# Altium PCB Stanok_driver.PcbDoc
Units mil, origin at the board's own origin, x right, y up, seen from the top; angles counter-clockwise.
Board outline 6000 x 4000 mil, 2 copper layers (Top Layer, Bottom Layer), stack 61.756 mil thick; 63 components, 42 nets, 179 pads, 0 vias.
Unrouted connection lines stored in the file: 114.
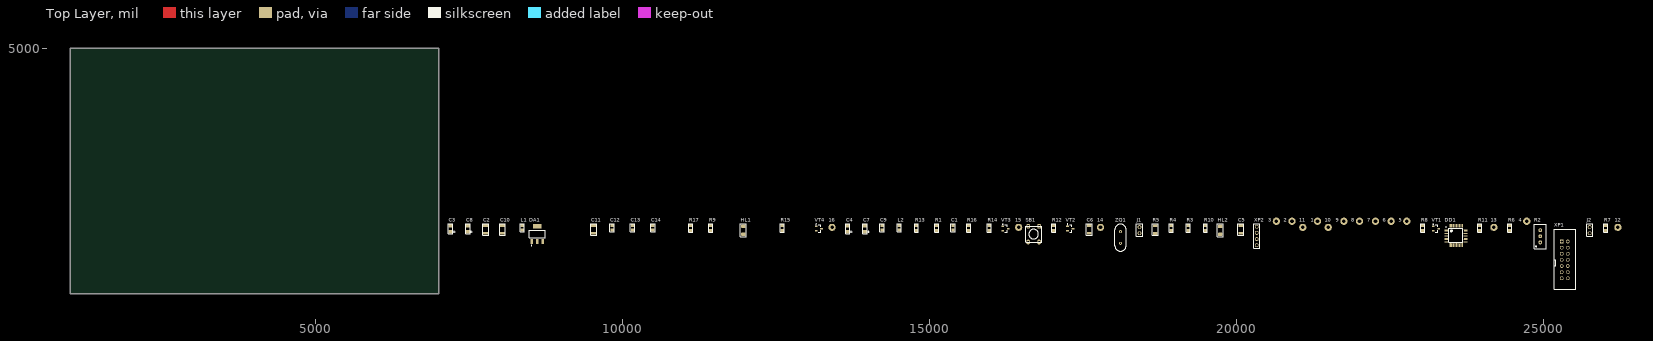
[diagram p0: Top Layer view]
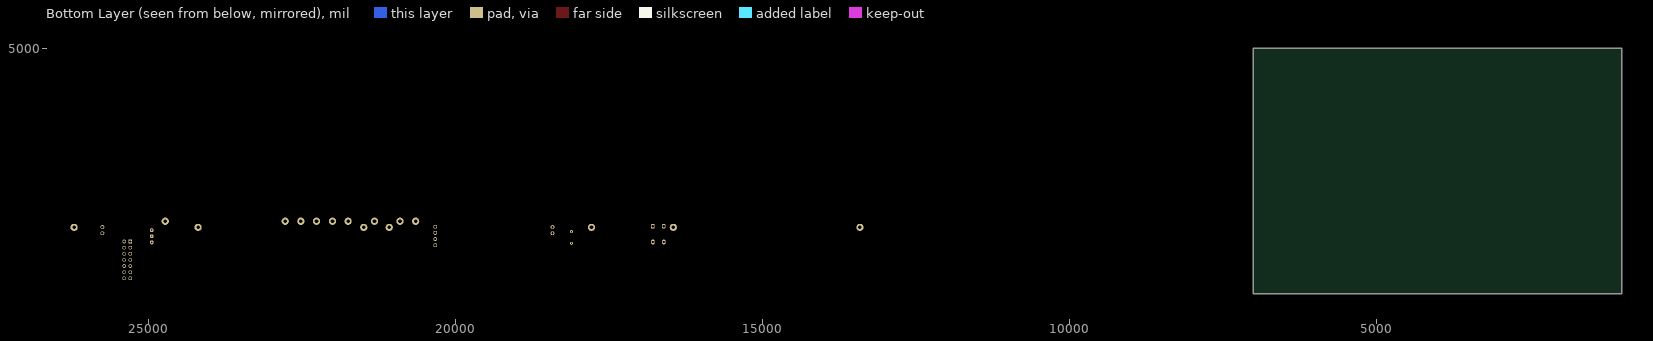
[diagram p1: Bottom Layer view, seen from below]

## Layer stack, top to bottom
Top Solder: solder mask 1, SM-001, Dk 4
Top Layer: signal copper 1.378
Dielectric 1: core 59, Core-043, Dk 4.3
Bottom Layer: signal copper 1.378
Bottom Solder: solder mask 1, SM-001, Dk 4

## Board outline
1000,1000 7000,1000 7000,5000 1000,5000

## Design rules (kind name [scope] priority, off if disabled: settings)
Clearance [All] p1: gap=10 ignorepadtopadclearanceinfootprint=FALSE except(0: Arc-Hole Track-Hole SMDPad-Hole THPad-Hole Via-Hole Fill-Hole Poly-Hole Region-Hole Text-Hole)
PolygonConnect [All] p1: connectstyle=Relief reliefconductorwidth=10 reliefentries=4 polygonreliefangle="90 Angle" airgapwidth=10
RoomDefinition DrillingL152 [InComponentClass('DrillingL152')] p1: confinementstyle=ConfineIn formatcopy=TRUE lockcomponents=FALSE outline 7045,1060 26285,1060 26285,2255 7045,2255
RoutingVias [All] p1: holewidth=28 width=50 viastyle="Through Hole" minholewidth=28 minwidth=50 maxholewidth=28 maxwidth=50
SolderMaskExpansion [All] p1: expansion=4 istentingtop=FALSE
Width [All] p1: maxlimit=10 minlimit=10 preferedwidth=10
30 further rules are at their usual default settings.

## Components (designator, comment, footprint, x,y, rotation, side; value= is the part's Value field where it differs from the comment)
1 "PIN" Hole 21320,2185 r90 top
2 "PIN" Hole 20905,2185 r90 top
3 "PIN" Hole 20650,2185 r90 top
4 "PIN" Hole 24730,2185 r90 top
5 "PIN" Hole 22775,2185 r90 top
6 "PIN" Hole 22520,2185 r90 top
7 "PIN" Hole 22265,2185 r90 top
8 "PIN" Hole 22005,2185 r90 top
9 "PIN" Hole 21750,2185 r90 top
10 "PIN" Hole 21495,2085 r0 top
11 "PIN" Hole 21080,2085 r0 top
12 "PIN" Hole 26215,2085 r0 top
13 "PIN" Hole 24195,2085 r0 top
14 "PIN" Hole 17785,2085 r0 top
15 "PIN" Hole 16450,2085 r0 top
16 "PIN" Hole 13410,2085 r0 top
C1 "0,1 мк" C0805 15380,2040 r90 top
C2 "0,1 мк" CAPC_1206 7765,1990 r90 top
C3 "10 мк" 3216 7195,2015 r90 top
C4 "10 мк" 3216 13665,2015 r90 top
C5 "20" CAPC_1206 20070,1990 r90 top
C6 "20" CAPC_1206 17600,1990 r90 top
C7 "1 мк" 3216 13945,2015 r90 top
C8 "10 мк" 3216 7475,2015 r90 top
C9 "0,1 мк" C0805 14225,2040 r90 top
C10 "0,1 мк" CAPC_1206 8040,1990 r90 top
C11 "1 мк" CAPC_1206 9525,1990 r90 top
C12 "0,1 мк" C0805 9825,2040 r90 top
C13 "0,1 мк" C0805 10160,2040 r90 top
C14 "0,1 мк" C0805 10490,2040 r90 top
DA1 "LM1117" SOT223 8515,1855 r0 top
DD1 "STM32L052C8T6" LQFP48_L 23575,1955 r0 top
HL1 "GNL-3014SRD" 1206 11965,2035 r90 top
HL2 "GNL-3014SRD" 1206 19735,2035 r90 top
J1 "PLS-2" PLS-2 18420,1990 r90 top
J2 "PLS-2" PLS-2 25755,1990 r90 top
L1 "BLM21PG300SH1D" C0805 8360,2040 r90 top
L2 "BLM21PG331SH1D" C0805 14505,2040 r90 top
R1 "10 k" RC0805-2 15115,2035 r90 top
R2 "10k" 3296W 24950,1840 r90 top
R3 "560" RC0805-2 19215,2035 r90 top
R4 "10 к" RC0805-2 18935,2035 r90 top
R5 "1 М" SMD_1206 18675,1985 r90 top
R6 "560" RC0805-2 24450,2035 r90 top
R7 "10 к" RC0805-2 26015,2035 r90 top
R8 "330" RC0805-2 23035,2035 r90 top
R9 "1 k" RC0805-2 11435,2035 r90 top
R10 "1 k" RC0805-2 19495,2035 r90 top
R11 "10 к" RC0805-2 23965,2035 r90 top
R12 "330" RC0805-2 17025,2035 r90 top
R13 "10 к" RC0805-2 14785,2035 r90 top
R14 "330" RC0805-2 15970,2035 r90 top
R15 "330" RC0805-2 12600,2035 r90 top
R16 "10 к" RC0805-2 15635,2035 r90 top
R17 "10 к" RC0805-2 11105,2035 r90 top
SB1 "SWT-2" SWT2 16695,1975 r0 top
VT1 "IRLML2803" SOT-23_N 23250,2065 r0 top
VT2 "IRLML2803" SOT-23_N 17290,2065 r0 top
VT3 "IRLML2803" SOT-23_N 16235,2065 r0 top
VT4 "IRLML2803" SOT-23_N 13195,2065 r0 top
XP1 "BH-14" PLD-14 25300,1855 r0 top
XP2 "" PLS-4 20330,1795 r90 top
ZQ1 "8 MHz" HC-49U 18110,1825 r90 top

## Footprints (in the part's own frame and the unit in brackets; to place one, negate y for a bottom-side part, rotate by r counter-clockwise, add the part's x,y. Pads: shape width x height; smd on the part's side, far side on the other; paste and mask are expansions set on the pad)
1206 [mm]
  rrect50% 1.5x1.8 smd: 1(-1.6,0) 2(1.7,0)
  Top Layer pour cut-out: -0.6,0.9 -0.6,-0.9 0.6,-0.9 0.6,0.9
  silkscreen extent -2.7,-1.2 2.7,1.2, body extent -1.6,-0.8 1.6,0.8, height 0.53
3216 [mm]
  rect 1.4x1.6 smd: 1(0,0) 2(2.5,0)
  silkscreen extent -0.76,-1.9 3.3,0.9, body extent -0.45,-0.9 2.95,0.9, height 1.8
3296W [mm]
  round 1.6 hole 0.8: 1(0,0) 2(2.54,0) 3(5.08,0)
  silkscreen extent -2.54,-2.54 7.62,2.54, body extent -2.21,-2.5 7.29,2.35, height 13
C0805 [mm] "Chip Capacitor, Body 2.0x1.3mm, IPC High Density"
  rect 1.2x1.4 smd: 1(0,0) 2(2,0)
  silkscreen extent -0.64,-0.89 2.67,0.89, body extent 0,-0.63 2,0.62, height 0.78
CAPC_1206 [mm] "Chip Capacitor, 2-Leads, Body 3,30x1,70mm, IPC Medium Density"
  rect 1.2x2 smd: 1(0,0) 2(3.2,0)
  silkscreen extent -0.8,-1.2 4,1.2, body extent 0,-0.8 3.2,0.8, height 1
HC-49U [mm]
  round 1.2 hole 0.6: 1(0,0) 2(4.88,0)
  silkscreen extent -3.3,-2.3 8,2.3, body extent -3.22,-2.33 8.12,2.33, height 3.9
Hole [mm]
  round 3 hole 1.5: 1(0,0)
LQFP48_L [mm] "Thin QFP, 48-Leads, Body 7x7mm, Pitch 0.5mm, IPC High Density"
  oval 1.55x0.25 smd: 1(-4.025,2.75) 2(-4.025,2.25) 3(-4.025,1.75) 4(-4.025,1.25) 5(-4.025,0.75) 6(-4.025,0.25) 7(-4.025,-0.25) 8(-4.025,-0.75) 9(-4.025,-1.25) 10(-4.025,-1.75) 11(-4.025,-2.25) 12(-4.025,-2.75) 25(4.025,-2.75) 26(4.025,-2.25) 27(4.025,-1.75) 28(4.025,-1.25) 29(4.025,-0.75) 30(4.025,-0.25) 31(4.025,0.25) 32(4.025,0.75) 33(4.025,1.25) 34(4.025,1.75) 35(4.025,2.25) 36(4.025,2.75)
  oval 0.25x1.55 smd: 13(-2.75,-4.025) 14(-2.25,-4.025) 15(-1.75,-4.025) 16(-1.25,-4.025) 17(-0.75,-4.025) 18(-0.25,-4.025) 19(0.25,-4.025) 20(0.75,-4.025) 21(1.25,-4.025) 22(1.75,-4.025) 23(2.25,-4.025) 24(2.75,-4.025) 37(2.75,4.025) 38(2.25,4.025) 39(1.75,4.025) 40(1.25,4.025) 41(0.75,4.025) 42(0.25,4.025) 43(-0.25,4.025) 44(-0.75,4.025) 45(-1.25,4.025) 46(-1.75,4.025) 47(-2.25,4.025) 48(-2.75,4.025)
  silkscreen extent -4.15,-2.85 2.85,3.55, body extent -4.5,-4.5 4.5,4.5, height 1.6
PLD-14 [mm]
  rect 1.5x1.5 hole 1: 1(0,0)
  round 1.5 hole 1: 2(2.54,0) 3(0,-2.54) 4(2.54,-2.54) 5(0,-5.08) 6(2.54,-5.08) 7(0,-7.62) 8(2.54,-7.62) 9(0,-10.16) 10(2.54,-10.16) 11(0,-12.7) 12(2.54,-12.7) 13(0,-15.24) 14(2.54,-15.24)
  silkscreen extent -3.2,-19.79 5.9,5.09
PLS-2 [mm]
  round 1.6 hole 1: 1(0,0) 2(2.54,0)
  silkscreen extent -1.27,-1.27 3.95,1.27, body extent -1.27,-1.27 3.81,1.27, height 8.5
PLS-4 [mm]
  round 1.6 hole 1: 1(0,0) 2(2.54,0) 3(5.08,0) 4(7.62,0)
  silkscreen extent -1.27,-1.27 8.89,1.27, body extent -1.27,-1.27 8.89,1.27, height 8.5
RC0805-2 [mm] "2.0x1.4mm"
  rect 1.2x1.4 smd: 1(0,0) 2(2,0)
  silkscreen extent -0.75,-0.8 2.75,0.8, body extent 0,-0.63 2,0.62, height 0.78
SMD_1206 [mm]
  rect 1.2x2 smd: 1(0,0) 2(3.2,0)
  silkscreen extent -0.8,-1.2 4,1.2, body extent 0,-0.8 3.2,0.8, height 1
SOT223 [mm] "SOT-223/SC-73; 4 Leads; Body 6.7 x 7.3 mm, inc. leads (LxW max)"
  rect 1.1x2 smd: 1(0,0) 2(2.3,0) 3(4.6,0)
  rect 3.5x2 smd: 4(2.3,6.3)
  silkscreen extent -1.05,-1.75 5.65,4.72, body extent -1.05,-0.2 5.65,6.62, height 1.95
SOT-23_N [mm]
  rect 1.15x0.6 smd: 1(-1.125,0.95) 2(-1.125,-0.95) 3(1.125,0)
  silkscreen extent -1.25,-1.5 0.7,1.92, body extent -1.25,-1.5 1.25,1.5, height 1.05
SWT2 [mm]
  rrect50% 1.5x2 hole 1: 1(2.25,3.25)
  oval 1.5x2 hole 1: 2(2.25,-3.25) 3(-2.25,3.25) 4(-2.25,-3.25)
  silkscreen extent -3.3,-3.3 3.3,3.25, body extent -3.25,-3.75 3.25,3.75, height 5.5

## Part data
1 2 3 4 5 6 7 8 9 10 11 12 13 14 15 16: "PIN, hole"
C1 C2 C5 C6 C9 C10 C11 C12 C13 C14: library part C, "Capasitor"
  C1: ValueSCH="0,1 мк"
  C2 C9 C10 C12 C13 C14: Component Type=Standard, Part Number=C, Pin Count=2, ValueSCH="0,1 мк"
  C5 C6: ValueSCH=20
  C11: Component Type=Standard, Part Number=C, Pin Count=2, ValueSCH="1 мк"
C3 C4 C7 C8: library part CapPol, "Capasitor_polar", Component Type=Standard, Part Number=CapPol, Pin Count=2
  C3 C4 C8: ValueSCH="10 мк"
  C7: ValueSCH="1 мк"
DA1: "Positive voltage regulators", Manufacturer="National Semiconductor", ComponentLink1Description=Параметры, ComponentLink2Description="Сайт производителя", ManufacturerPartNumber=LM1117, Корпус=SOT-223
DD1: library part STM32F103C8T6, "STM32 ARM-based 32-bit MCU with 32 Kbytes Flash, 48-pin LQFP, Industrial Temperature", ComponentLink1Description="Manufacturer Link", ComponentLink1URL=www.st.com/stm32, ComponentLink2Description=Datasheet, ComponentLink2URL=http://www.st.com/stonline/products/literature/ds/13587.pdf, DatasheetVersion="rev6, Mar-2008", PackageDescription="48-Pin Low-Profile Quad Flat Pack, 7 x 7 mm Body, 0.5 mm Pitch (LQFP48)", PackageReference=LQFP48, PackageVersion=Mar-2008, Published=30-May-2008, Publisher="Altium Limited"
HL1 HL2: library part GNL-3014RED, ValueBOM="Диод GNL-3014SRD", ComponentLink1Description=Datasheet, ComponentLink1URL=E:\BaseComponent_TCNIRT\PDF\GNL-3014.pdf, Date=01.10.2019, Part Number=GNL-3014RED, Type=VD
J1 J2: library part J2, "PLS-02", Manufacturer=Ningbo, ComponentLink1Description=Параметры, ComponentLink2Description="Сайт производителя", Jamper=S, ManufacturerPartNumber=PLS-2
L1 L2: library part B, "Ferrite bead"
R1 R3 R4 R5 R6 R7 R8 R9 R10 R11 R12 R13 R14 R15 R16 R17: library part R_Gost, "Resistor,2 Pin"
  R1: ValueSCH="10 k"
  R3 R6: ValueSCH=560
  R4 R7 R11 R13 R16 R17: ValueSCH="10 к"
  R5: ValueSCH="1 М"
  R8 R12 R14 R15: ValueSCH=330
  R9 R10: ValueSCH="1 k"
R2: library part Res_trimmer, "3296W", ComponentLink1Description=Параметры, ComponentLink2Description="Сайт протзводителя", Name=3296W
SB1: "SWT-2, key"
VT1 VT2 VT3 VT4: Manufacturer="Intarnational Rectifier", ValueBOM="Транзистор IRLML2803", ComponentLink1Description=Datasheet, ComponentLink1URL=E:\BaseComponent_TCNIRT\PDF\irlml2803pbf.pdf, Date=01.10.2019, Part Number=IRLML2803, Type=VT
XP1: Manufacturer=Ningbo, ComponentLink1Description=Параметры, ComponentLink2Description="Сайт производителя", ManufacturerPartNumber=BH-14
XP2: library part XP4, "XP4"
ZQ1: library part OSC, "OSC", ComponentLink1URL=D:\datasheet\Кварцы\00688.pdf

## Nets (pads, with @x,y where several pads share a name; then routed paths per layer and width w, separated by ;. In a path a pad name is that pad's centre, name@x,y a point inside that pad or via, vN(x,y) a via of type N, cw(c..) or ccw(c..) an arc to the next point about the centre after c; other vN are vias at no path point)
+3,3V: C4.1 C8.1 C10.1 C11.1 C12.1 C13.1 C14.1 DA1.2 DA1.4 DD1.1 DD1.24 DD1.36 DD1.48 HL2.1 J1.1 J2.2 L2.1 R1.2 R9.1 XP2.1
+5V: L1.1 R2.3 XP1.1
FORWARD: 10.1 DD1.45
GND: C1.1 C2.2 C3.2 C4.2 C5.1 C6.1 C7.2 C8.2 C9.2 C10.2 C11.2 C12.2 C13.2 C14.2 DA1.1 DD1.8 DD1.23 DD1.35 DD1.47 HL1.2 R2.1 R4.2 R7.2 R11.2 R13.1 R16.1 R17.1 SB1.1 SB1.2 VT1.2 VT2.2 VT3.2 VT4.2 XP1.2 XP1.5 XP2.3
MINUS: 6.1 DD1.40
Net1_1: 1.1 DD1.29
Net2_1: 2.1 DD1.30
Net3_1: 3.1 DD1.31
Net4_1: 4.1 DD1.10
Net13_1: 13.1 VT1.3
Net14_1: 14.1 VT2.3
Net15_1: 15.1 VT3.3
Net16_1: 16.1 VT4.3
NetC2_1: C2.1 C3.1 DA1.3 L1.2
NetC5_2: C5.2 DD1.5 DD1.44 R3.2 R4.1 R5.1 ZQ1.2
NetC6_2: C6.2 DD1.6 R5.2 ZQ1.1
NetC7_1: C7.1 C9.1 DD1.9 L2.2
NetDD1_2: DD1.2 R10.1
NetDD1_11: DD1.11 XP1.4
NetDD1_12: DD1.12 XP1.6
NetDD1_20: DD1.20 R6.2 R7.1
NetDD1_21: DD1.21 R12.2
NetDD1_22: DD1.22 R14.2
NetDD1_28: DD1.28 R15.2
NetHL1_1: HL1.1 R9.2
NetHL2_2: HL2.2 R10.2
NetJ1_2: J1.2 R3.1
NetJ2_1: J2.1 R6.1
NetR2_2: R2.2 XP1.3
NetR8_1: R8.1 R11.1 VT1.1
NetR12_1: R12.1 R13.2 VT2.1
NetR14_1: R14.1 R16.2 VT3.1
NetR15_1: R15.1 R17.2 VT4.1
NRST: C1.2 DD1.7 R1.1 SB1.3 SB1.4
ON: DD1.19 R8.2
PA13: DD1.34 XP2.4
PA14: DD1.37 XP2.2
PLUS: 7.1 DD1.41
REVERSE: 9.1 DD1.43
START: 5.1 DD1.39
STOP: 11.1 DD1.46
TAPPING: 8.1 DD1.42
pads on no net: 12.1 DD1.3 DD1.4 DD1.13 DD1.14 DD1.15 DD1.16 DD1.17 DD1.18 DD1.25 DD1.26 DD1.27 DD1.32 DD1.33 DD1.38 XP1.7 XP1.8 XP1.9 XP1.10 XP1.11 XP1.12 XP1.13 XP1.14